# Altium PCB doan2.PcbDoc
Units mil, origin at the board's own origin, x right, y up, seen from the top; angles counter-clockwise.
Board outline 3095 x 3385 mil, 2 copper layers (Top Layer, Bottom Layer); 54 components, 62 nets, 229 pads, 26 vias.
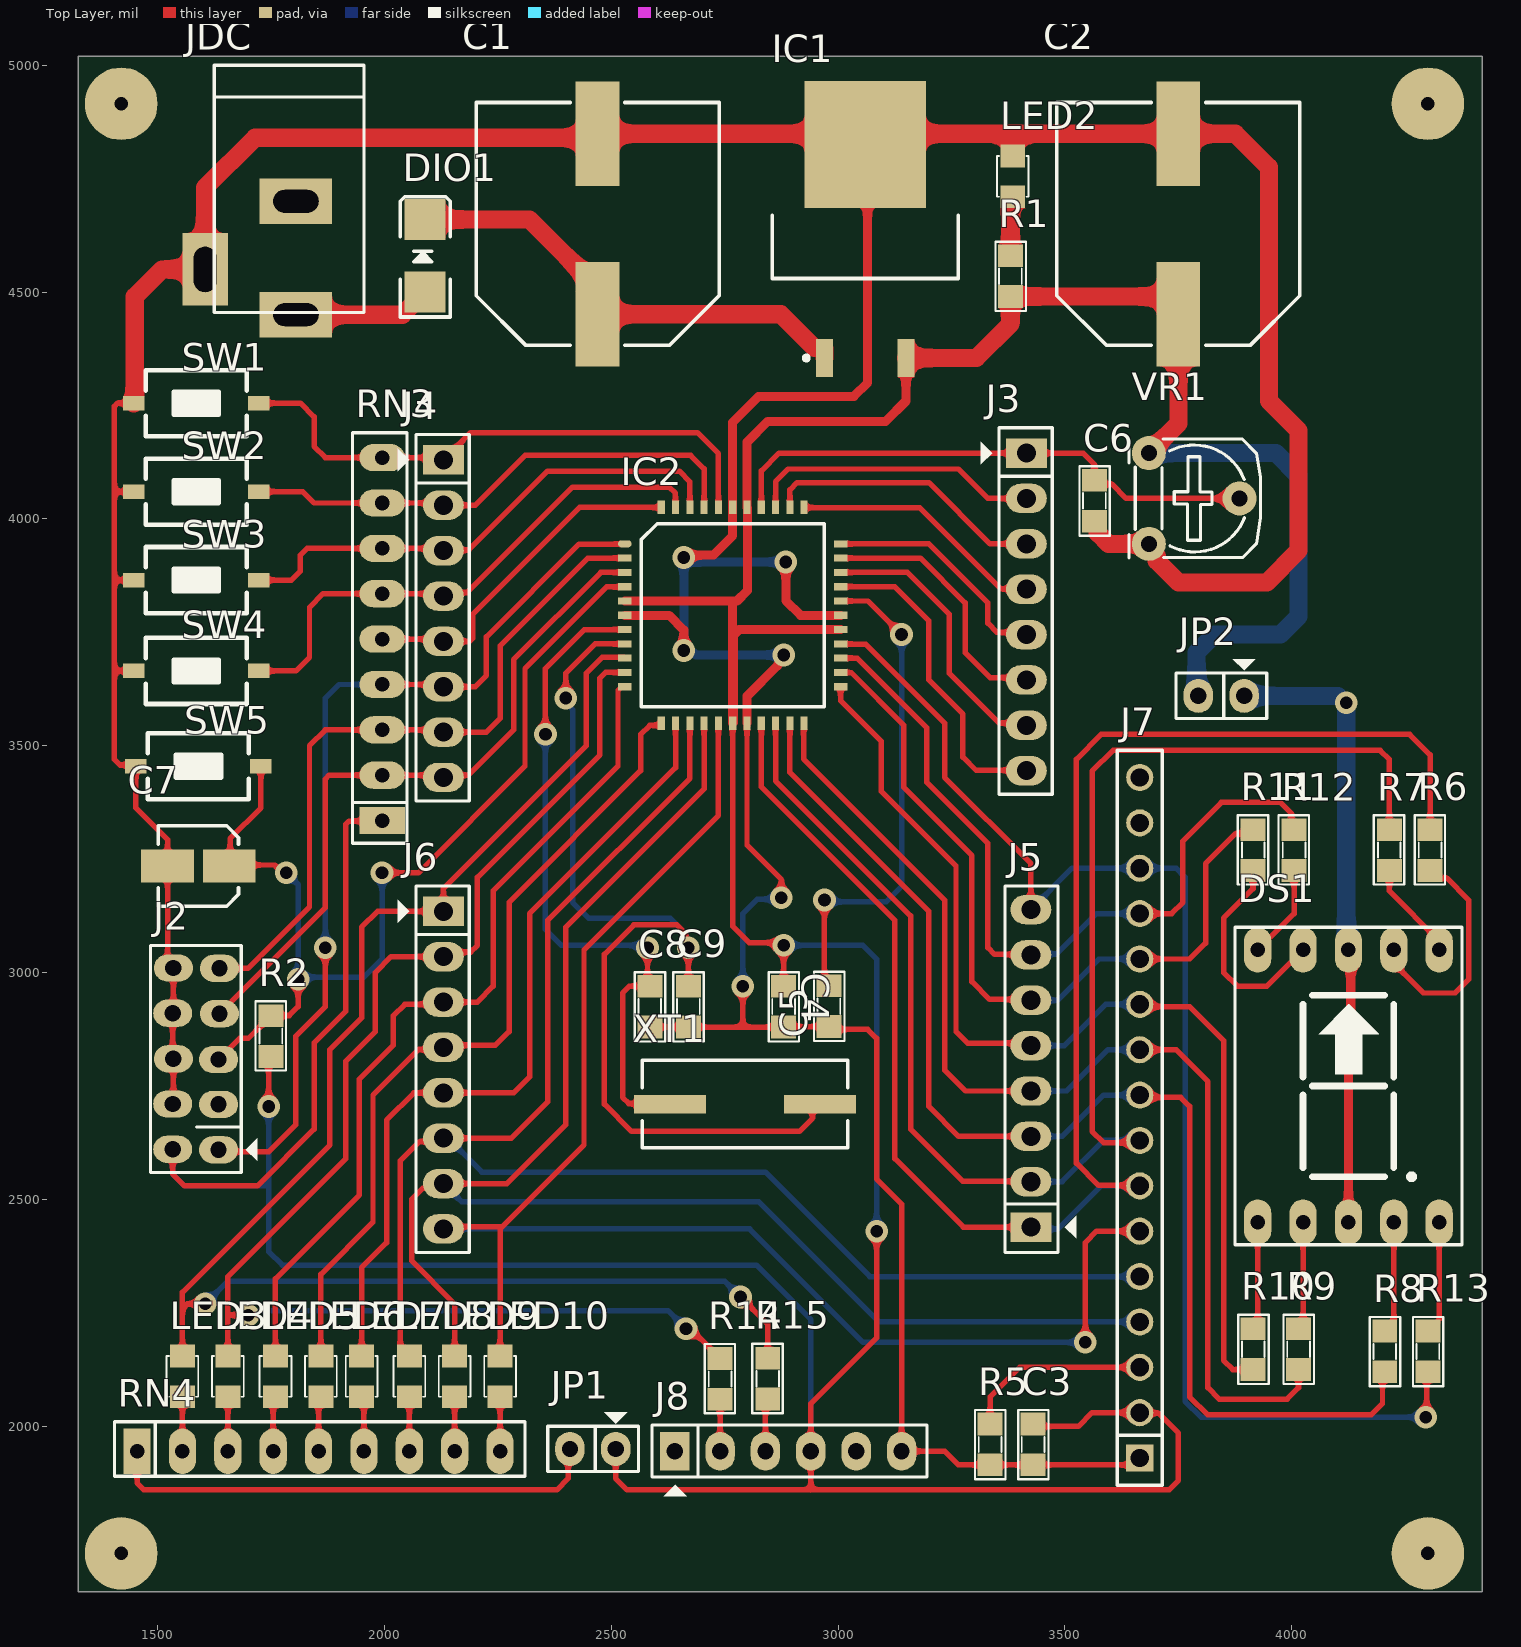
[diagram p0: Top Layer view]
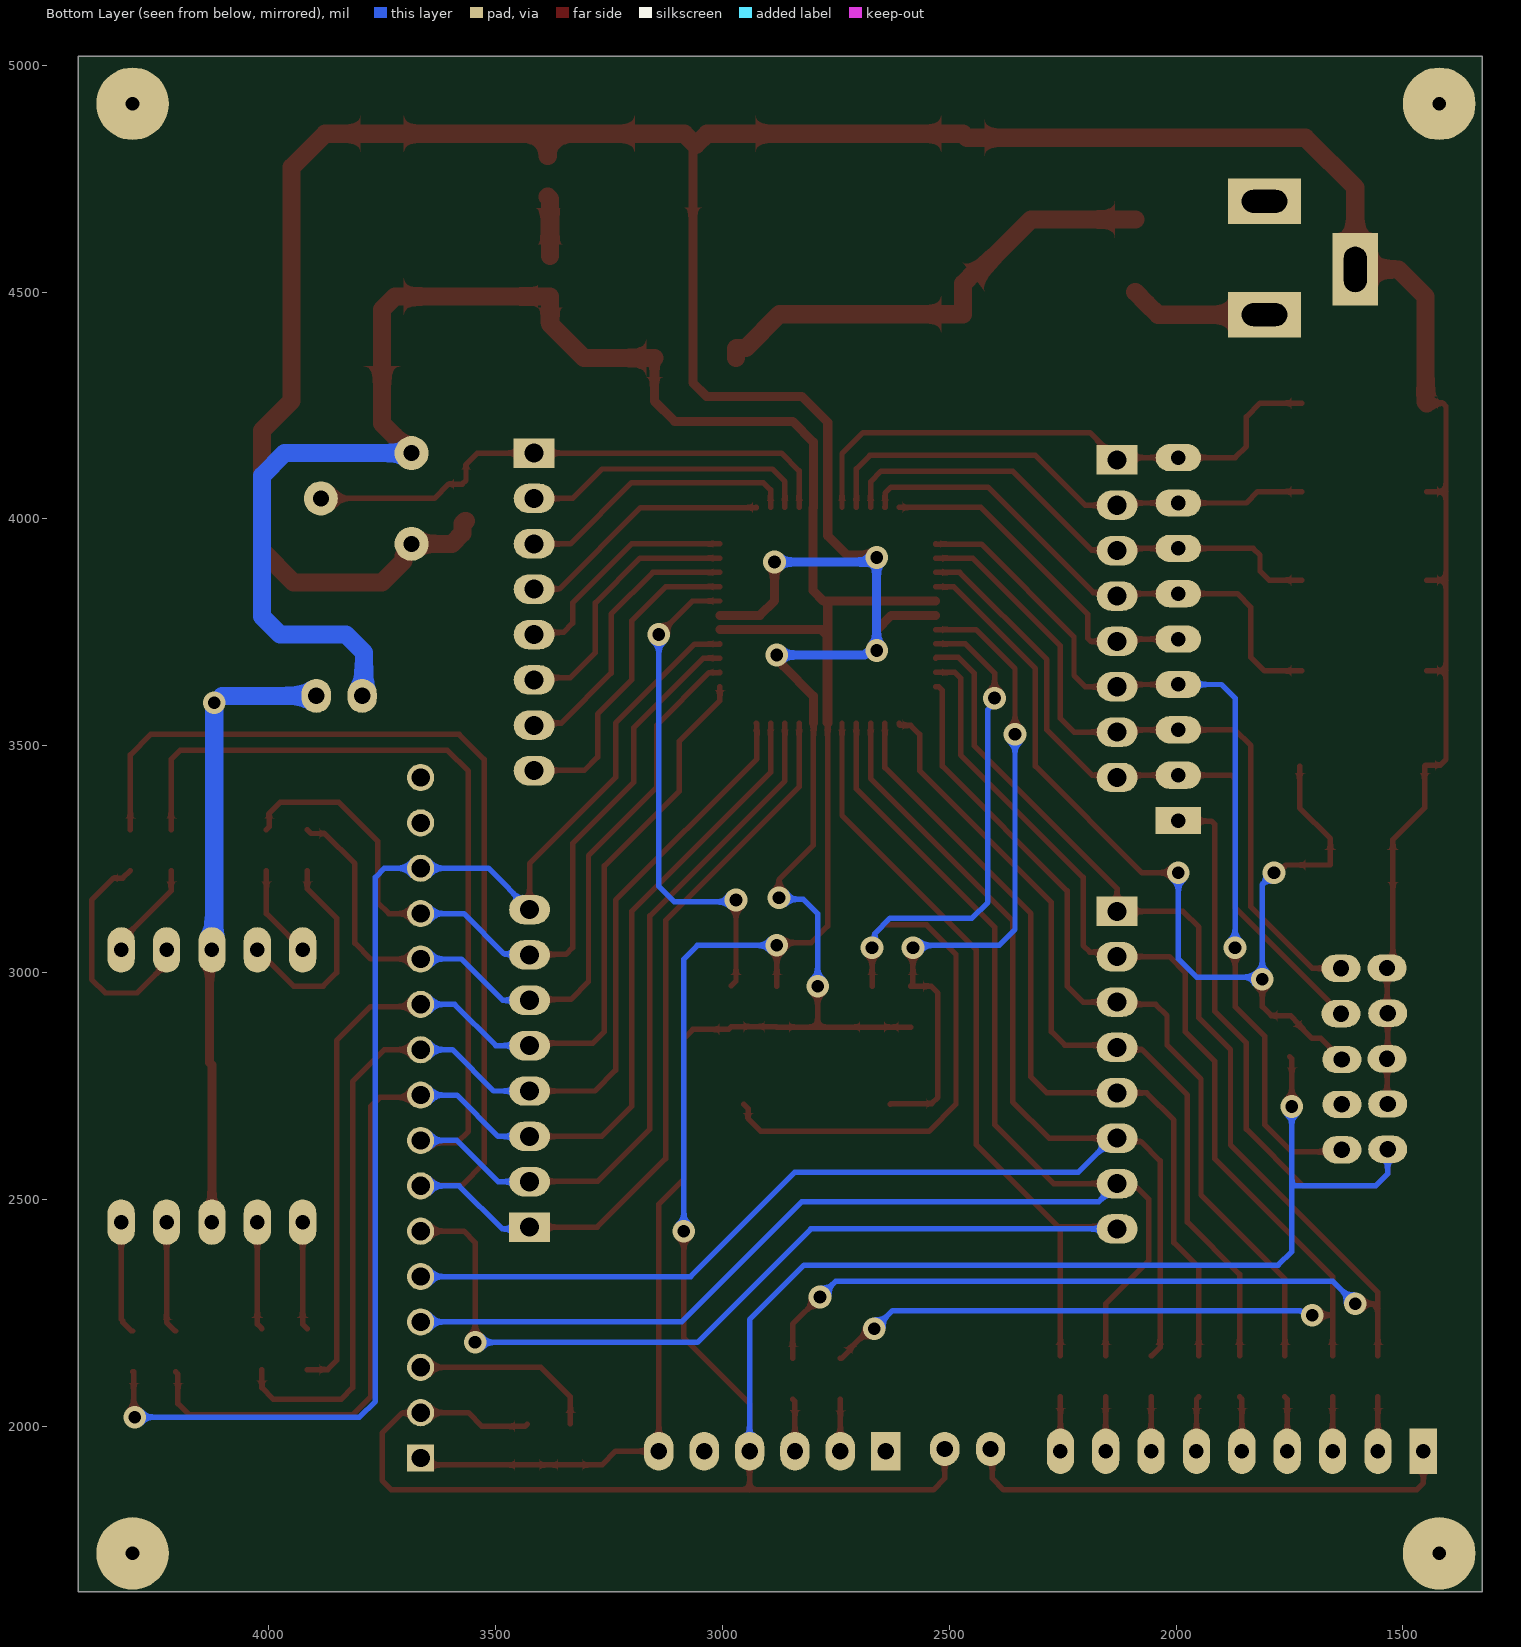
[diagram p1: Bottom Layer view, seen from below]
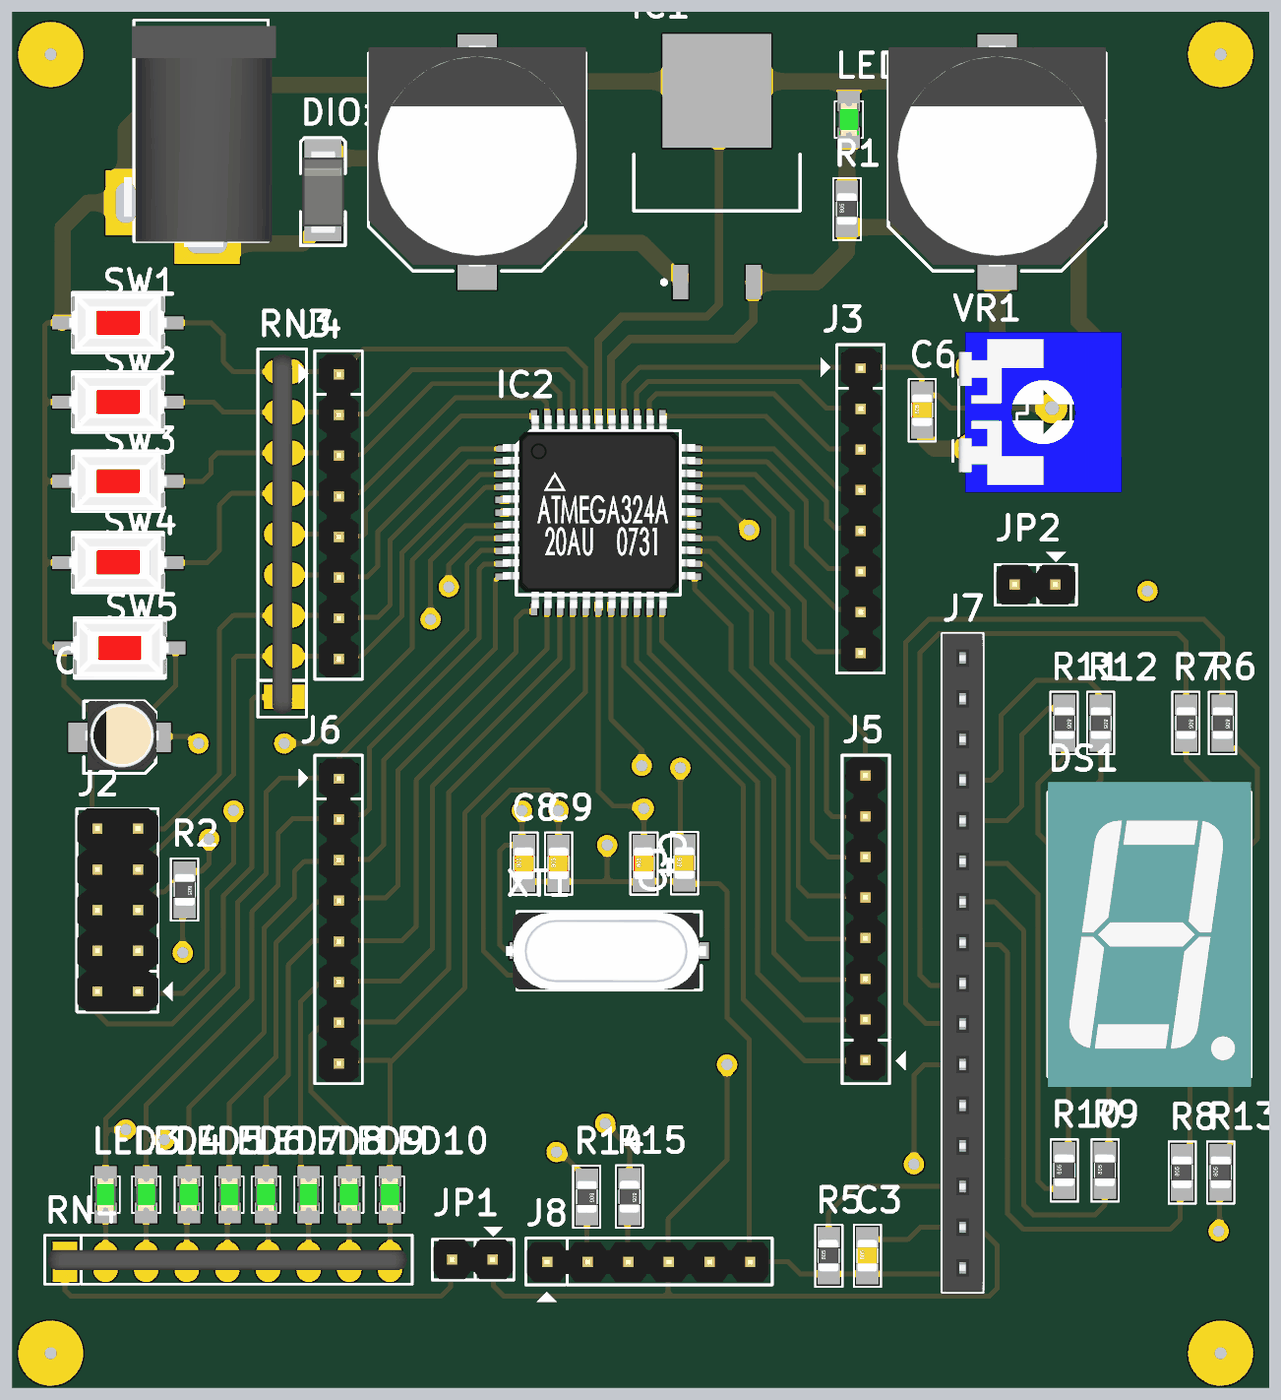
[diagram p2: 3D render of the assembled board from above, using the file's embedded part models]

## Layer stack, top to bottom
Top Solder: solder mask 0.4, Solder Resist, Dk 3.5
Top Layer: signal copper 1.4
Dielectric 1: dielectric 12.6, FR-4, Dk 4.8
Bottom Layer: signal copper 1.4
Bottom Solder: solder mask 0.4, Solder Resist, Dk 3.5

## Board outline
4420,5020 4420,1635 1325,1635 1325,5020

## Design rules (kind name [scope] priority, off if disabled: settings)
Clearance [All] p1: gap=10 ignorepadtopadclearanceinfootprint=FALSE except(0: Arc-Hole Track-Hole SMDPad-Hole THPad-Hole Via-Hole Fill-Hole Poly-Hole Region-Hole Text-Hole)
PolygonConnect [All] p1: connectstyle=Relief reliefconductorwidth=10 reliefentries=4 polygonreliefangle="90 Angle" airgapwidth=10
RoomDefinition doan2 [InComponentClass('doan2')] p1: confinementstyle=ConfineIn formatcopy=TRUE lockcomponents=FALSE outline 7045,1060 7275,1060 7275,1690 7045,1690
RoutingVias [All] p1: holewidth=28 width=50 viastyle="Through Hole" minholewidth=28 minwidth=50 maxholewidth=28 maxwidth=50
SolderMaskExpansion [All] p1: expansion=4 istentingtop=FALSE
Width [All] p1: maxlimit=40 minlimit=12 preferedwidth=20 minimp=50.000000 maximp=50.000000 favimp=50.000000
30 further rules are at their usual default settings.

## Components (designator, comment, footprint, x,y, rotation, side; value= is the part's Value field where it differs from the comment)
C1 "1000uF/16V" CAP1000uf/25V 2470,4650 r90 top
C2 "1000uF/16V" CAP1000uf/25V 3750,4650 r90 top
C3 "100n" SM-CAP-0805 3430,1915 r90 top value=0,1uF/300V
C4 "100n" SM-CAP-0805 2880,2880 r90 top value=0,1uF/300V
C5 "100n" SM-CAP-0805 2980,2881 r90 top value=0,1uF/300V
C6 "100n" SM-CAP-0805 3565,3995 r90 top value=0,1uF/300V
C7 "10uF/16V" CAP10uf/16V 1590,3235 r180 top value=1000uF/16V
C8 "22p" SM-CAP-0805 2585,2880 r90 top value=0,1uF/300V
C9 "22p" SM-CAP-0805 2670,2880 r90 top value=0,1uF/300V
DIO1 "Diode" DIO-SMD-106 2090,4580 r270 top value=1N5007
DS1 "7SEG S" 7SEGS 3925,2450 r0 top value="LED 7S SEG"
IC1 "LM7805" LM7805/DPAK 3060,4640 r90 top
IC2 "ATmega16L_dan" DIP44/W0.6 2530,3945 r0 top
J2 "JP5X2" JP5X2 1635,2610 r90 top
J3 "PA" JP8 3415,4145 r270 top value=JP7
J4 "PB" JP8 2130,4130 r270 top value=JP7
J5 "PC" JP8 3425,2439 r90 top value=JP7
J6 "PD" JP8 2130,3135 r270 top value=JP7
J7 "LCD 1602" JP16-C1T 3665,1930 r90 top
J8 "UART-USB" JP6 2640,1945 r0 top value=JP7
JDC "Jac DC" DC-IN 1705,4575 r270 top
JP1 "Jumper 2" JP2 2510,1950 r180 top value="JP 2"
JP2 "Jumper 2" JP2 3895,3610 r180 top value="JP 2"
LED2 "LED SMD" "SM-LED-0805-Green - duplicate" 3385,4710 r90 top
LED3 "LED SMD" "SM-LED-0805-Green - duplicate" 1555,2065 r90 top
LED4 "LED SMD" "SM-LED-0805-Green - duplicate" 1655,2065 r90 top
LED5 "LED SMD" "SM-LED-0805-Green - duplicate" 1760,2065 r90 top
LED6 "LED SMD" "SM-LED-0805-Green - duplicate" 1860,2065 r90 top
LED7 "LED SMD" "SM-LED-0805-Green - duplicate" 1950,2065 r90 top
LED8 "LED SMD" "SM-LED-0805-Green - duplicate" 2055,2065 r90 top
LED9 "LED SMD" "SM-LED-0805-Green - duplicate" 2155,2065 r90 top
LED10 "LED SMD" "SM-LED-0805-Green - duplicate" 2255,2065 r90 top
R1 "1k" SM-RES-0805 3380,4490 r90 top value="R1/4W - 1K"
R2 "10K" SM-RES-0805 1750,2905 r270 top value="R1/4W - 1K"
R5 "1k" SM-RES-0805 3335,1915 r90 top value="R1/4W - 1K"
R6 "1k" SM-RES-0805 4305,3315 r270 top value="R1/4W - 1K"
R7 "1k" SM-RES-0805 4215,3315 r270 top value="R1/4W - 1K"
R8 "1k" SM-RES-0805 4205,2120 r90 top value="R1/4W - 1K"
R9 "1k" SM-RES-0805 4015,2125 r90 top value="R1/4W - 1K"
R10 "1k" SM-RES-0805 3915,2125 r90 top value="R1/4W - 1K"
R11 "1k" SM-RES-0805 3915,3315 r270 top value="R1/4W - 1K"
R12 "1k" SM-RES-0805 4005,3315 r270 top value="R1/4W - 1K"
R13 "1k" SM-RES-0805 4300,2120 r90 top value="R1/4W - 1K"
R14 "100R" SM-RES-0805 2740,2149.5 r270 top value="R1/4W - 1K"
R15 "100R" SM-RES-0805 2845,2150 r270 top value="R1/4W - 1K"
RN3 "10K" RN8 1995,3335 r90 top value="Tro thanh 10K"
RN4 "1K" RN8 1455,1945 r0 top value="Tro thanh 10K"
SW1 "SW-SMD" SW-SMD 1585.42,4255 r0 top
SW2 "SW-SMD" SW-SMD 1585.42,4060 r0 top
SW3 "SW-SMD" SW-SMD 1585.42,3865 r0 top
SW4 "SW-SMD" SW-SMD 1585.42,3665 r0 top
SW5 "RESET" SW-SMD 1590,3455 r0 top
VR1 "10K" VR 3685,4145 r270 top value="VR 10K"
XT1 "8Mhz" XT2 2795,2710 r180 top value=4Mhz

## Footprints (in the part's own frame and the unit in brackets; to place one, negate y for a bottom-side part, rotate by r counter-clockwise, add the part's x,y. Pads: shape width x height; smd on the part's side, far side on the other; paste and mask are expansions set on the pad)
7SEGS [mil] "DIP 10 Leads; Body 12 x 15 mm; Pitch 0.5 mm"
  oval 60x100 hole 32: 1(0,0) 2(100,0) 3(200,0) 4(300,0) 5(400,0) 6(400,600) 7(300,600) 8(200,600) 9(100,600) 10(0,600)
  silkscreen extent -50,-50 450,650, body extent -50,-75 450,675, height 316
CAP10uf/16V [mm] "Aluminum Electrolytic Capacitor, Body 4.30x4.30x5.50mm, IPC Low Density"
  rect 2.95x1.85 smd: 1(-1.725,0) 2(1.725,0)
  silkscreen extent -2.25,-2.25 2.25,2.25, body extent -2.44,-2.27 2.16,2.03, height 5.63
CAP1000uf/25V [mm] "Aluminum Electrolytic Capacitor, Body 13.50x13.50x13.50mm, IPC Low Density"
  rect 5.85x2.45 smd: 1(-5.05,0) 2(5.05,0)
  silkscreen extent -6.8,-6.8 6.8,6.8, body extent -6.52,-6.8 7.28,6.8, height 13.5
DC-IN [mil] "Jac DC input"
  rect 100x160 hole 50 slot 100 at 90 deg: 1(125,100) 2(-125,100)
  rect 160x100 hole 50 slot 100 at 0 deg: 3(25,-100)
  silkscreen extent -425,-80 120,250, body extent -410,-105 134,269, height 434
DIO-SMD-106 [mil]
  rect 90x90.55 smd: 1(80,0) 2(-80,0)
  silkscreen extent -130,-55 135,55, body extent -99,-50 106,52, height 95
DIP44/W0.6 [mm] "44PIN"
  oval 0.75x0.4 smd: 1(0,0)
  rect 0.75x0.4 smd: 2(0,-0.8) 3(0,-1.6) 4(0,-2.4) 5(0,-3.2) 6(0,-4) 7(0,-4.8) 8(0,-5.6) 9(0,-6.4) 10(0,-7.2) 11(0,-8) 23(12.08,-8) 24(12.08,-7.2) 25(12.08,-6.4) 26(12.08,-5.6) 27(12.08,-4.8) 28(12.08,-4) 29(12.08,-3.2) 30(12.08,-2.4) 31(12.08,-1.6) 32(12.08,-0.8) 33(12.08,0)
  rect 0.4x0.75 smd: 12(2.04,-10.04) 13(2.84,-10.04) 14(3.64,-10.04) 15(4.44,-10.04) 16(5.24,-10.04) 17(6.04,-10.04) 18(6.84,-10.04) 19(7.64,-10.04) 20(8.44,-10.04) 21(9.24,-10.04) 22(10.04,-10.04) 34(10.04,2.04) 35(9.24,2.04) 36(8.44,2.04) 37(7.64,2.04) 38(6.84,2.04) 39(6.04,2.04) 40(5.24,2.04) 41(4.44,2.04) 42(3.64,2.04) 43(2.84,2.04) 44(2.04,2.04)
  silkscreen extent 0.91,-9.13 11.17,1.13, body extent 0.08,-9.95 12.11,2.08, height 1.01
JP2 [mil]
  oval 65x75 hole 36: 1(0,0) 2(101,0)
  silkscreen extent -50,-81 150,50, body extent -48,-50 148,48, height 323
JP5X2 [mil]
  oval 60x86 hole 36: 1(-0.5,0.5) 2(99.5,0.5) 3(198.5,0.5) 4(299.5,-1.5) 5(399.5,-1.5) 6(0.5,101.5) 7(100.5,101.5) 8(200,100) 9(300.5,101.5) 10(400,100)
  silkscreen extent -51,-85 450,151, body extent -50,-50 450,150, height 335
JP6 [mil] "JP6"
  rect 65x85 hole 36: 1(0,0)
  oval 65x85 hole 36: 2(100,0) 3(200,0) 4(300,0) 5(400,0) 6(500,0)
  silkscreen extent -50,-99 556,58, body extent -48,-50 548,48, height 323
JP8 [mil] "JP8"
  rect 65x90 hole 42: 1(0,0)
  oval 65x90 hole 42: 2(100,0) 3(200,0) 4(300,0) 5(400,0) 6(500,0) 7(600,0) 8(700,0)
  silkscreen extent -56,-100 752,57, body extent -48,-50 748,48, height 323
JP16-C1T [mm] "16 row, straight, gold plating"
  rect 1.52x1.52 hole 1.02: 1(0,0)
  round 1.52 hole 1.02: 2(2.54,0) 3(5.08,0) 4(7.62,0) 5(10.16,0) 6(12.7,0) 7(15.24,0) 8(17.78,0) 9(20.32,0) 10(22.86,0) 11(25.4,0) 12(27.94,0) 13(30.48,0) 14(33.02,0) 15(35.56,0) 16(38.1,0)
  silkscreen extent -1.52,-1.27 39.62,1.27, body extent -1.52,-1.25 39.62,1.25, height 8.51
LM7805/DPAK [mm] "D2-PAK, 3-Pads, Body 7.78x8.56mm (max), IPC Medium Density"
  rect 2.15x0.95 smd: 1(-7.25,2.28) 3(-7.25,-2.28)
  rect 7.1x6.8 smd: 2(4.7,0)
  silkscreen extent -7.37,-5.2 0.75,5.2, body extent -2.8,-5.2 6.55,5.2, height 4.6
RN8 [mil] "R SIP8, 9 Pin"
  rect 60x100 hole 32: 1(0,0)
  oval 60x100 hole 32: 2(100,0) 3(200,0) 4(300,0) 5(400,0) 6(500,0) 7(600,0) 8(700,0) 9(800,0)
  silkscreen extent -50,-55 855,65, body extent -43,-20 843,29, height 219
SM-CAP-0805 [mil]
  rect 50x55 smd: 1(0,0) 2(90,0)
  silkscreen extent -32,-34 121,33, body extent 6,-25 84,25, height 31
"SM-LED-0805-Green - duplicate" [mil]
  rect 50x55 smd: 1(0,0) 2(90,0)
  silkscreen extent 0,-35 90,35, body extent 5,-25 85,25, height 43
SM-RES-0805 [mil]
  rect 50x55 smd: 1(0,0) 2(90,0)
  silkscreen extent -32,-34 121,33, body extent 6,-25 84,25, height 31
SW-SMD [mm] "Switch SMD type"
  rect 1.2x0.8 smd: 1(-3.5,0) 2(3.5,0)
  silkscreen extent -2.82,-1.85 2.82,1.85, body extent -3.05,-1.85 3.05,1.85, height 2.5
VR [mil] "Resistor Variable"
  round 75 hole 35: 1(0,0) 2(100,200) 3(200,0)
  silkscreen extent -31,-44 231,246, body extent -87,-30 307,372, height 165
XT2 [mm] "Molded Capacitor, 2-Leads, Body 11.40x4.43mm, IPC Medium Density"
  rect 4.05x1.05 smd: 1(-4.2,0) 2(4.2,0)
  silkscreen extent -5.75,-2.45 5.75,2.45, body extent -6.05,-2.38 6.45,2.42, height 4.01

## Part data
C1 C2: library part CAP1000uf/25V, "Cap 1000uF/16V - 220uF/50V", Description 1="2200uF-3300uF/6,3V - 1000uF-2200uF/10V", Description 2="1000uF/16V - 470uF => 1000uF/25V - 100uF/100V", Description 3=330uF>470uF/35V_220uF>470uF/50V_10uF>22uF/250V, Description 4="220uF => 330uF/63V - 10uF =>33uF/160 - 200V", Description 5="4,7uF>10uF/250V_3,3uF>10uF/400V - 2,2uF>4,7uF/450V"
C3 C4 C5 C6 C8 C9: library part CN, Designed by=VanDungEvn
C7: library part CAP10uf/16V, "Cap 1000uF/16V - 220uF/50V", Description 1="2200uF-3300uF/6,3V - 1000uF-2200uF/10V", Description 2="1000uF/16V - 470uF => 1000uF/25V - 100uF/100V", Description 3=330uF>470uF/35V_220uF>470uF/50V_10uF>22uF/250V, Description 4="220uF => 330uF/63V - 10uF =>33uF/160 - 200V", Description 5="4,7uF>10uF/250V_3,3uF>10uF/400V - 2,2uF>4,7uF/450V"
DIO1: "Default Diode", Code - JEDEC=DO-214-AB, Published=8-Jun-2000, Publisher="Altium Limited", Revision="July-2002: Re-released for DXP Platform."
DS1: library part LED7S, "Single 7 Seg Dipslay"
J3 J4 J5 J6: library part JP8, "JP8 PIN"
J7: library part JP16, "WR-PHD 2.54 mm Angled Socket Header", Manufacturer="W¨¹rth Elektronik eiSos GmbH", partNo=613016143121, ComponentLink1 Description=Manufacturer, ComponentLink1URL=http://www.we-online.com, ComponentLink2 Description=Datasheet, ComponentLink2URL=http://katalog.we-online.de/em/datasheet/6130xx143121.pdf, Created by="Karrer Zheng", Created Date="29 March 2013", NoPins=16
J8: library part JP6, "JP6 PIN"
JDC: library part DCIN, "Jac DC input"
JP1 JP2: library part "JP 2"
LED2 LED3 LED4 LED5 LED6 LED7 LED8 LED9 LED10: library part LED-SMD-0805
R1 R2 R5 R6 R7 R8 R9 R10 R11 R12 R13 R14 R15: library part R1/4W, "Resistor 1/4W"
RN3 RN4: library part RN8, "Resistor 8 (Thanh)"
SW1 SW2 SW3 SW4: "Switch", LatestRevisionDate=17-Jul-2002, LatestRevisionNote="Re-released for DXP Platform.", PackageReference=SPST-2, Published=24-Mar-1999, Publisher="Altium Limited"
SW5: library part SW-SMD, "Switch", LatestRevisionDate=17-Jul-2002, LatestRevisionNote="Re-released for DXP Platform.", PackageReference=SPST-2, Published=24-Mar-1999, Publisher="Altium Limited"
VR1: library part VR, "Var Resistor"
XT1: library part XT2, "Crystal For all Crystal 2pin."

## Free pads (board coordinates)
  round 160 hole 30: 2(4300,4915) 3(4300,1720) 5(1420,4915) 7(1420,1720)

## Via types
v1: diameter 50, hole 28, Top Layer to Bottom Layer, 26 vias

## Nets (pads, with @x,y where several pads share a name; then routed paths per layer and width w, separated by ;. In a path a pad name is that pad's centre, name@x,y a point inside that pad or via, vN(x,y) a via of type N, cw(c..) or ccw(c..) an arc to the next point about the centre after c; other vN are vias at no path point)
AVR_RX: IC2.9 J6.1 LED3.2 R15.1 | length 3488.1
  Top Layer w12: LED3.2 1555,2260 ; v1(1605,2270) 1565,2270 1555,2260 ; IC2.9 2528.13,3694.91 2514.3,3694.91 2514.21,3695 2480,3695 2445,3660 2445,3500 2130,3185 J6.1 1985,3135 1950,3100 1950,2900 1880,2830 1880,2620 1555,2295 1555,2260 ; v1(2785,2285) 2845,2225 R15.1
  Bottom Layer w12: v1(1605,2270) 1655,2320 2750,2320 v1(2785,2285)
AVR_TX: IC2.10 J6.2 LED4.2 R14.1 | length 3125.8
  Top Layer w12: LED4.2 1655,2242.5 ; v1(1700,2245) 1657.5,2245 1655,2242.5 ; IC2.10 2487.58,3661.54 2475,3648.95 2475,3480 2205,3210 2205,3060 2190.14,3045.14 2140.14,3045.14 J6.2 2015,3035 1980,3000 1980,2870 1915,2805 1915,2590 1655,2330 1655,2242.5 ; v1(2665,2215) 2674.5,2215 2718.5,2171 2718.5,2168.5 2737.5,2149.5 R14.1
  Bottom Layer w12: v1(1700,2245) 1707.27,2252.27 1723.3,2252.27 1726.03,2255 2625,2255 v1(2665,2215)
FT_RX: J8.2 R14.2 | length 114.5
  Top Layer w12: J8.2 R14.2
FT_TX: J8.3 R15.2 | length 117.1
  Top Layer w12: J8.3 2840,2055 R15.2
GND: C1.2 C2.2 C3.1 C4.1 C5.1 C6.1 C7.2 C8.1 C9.1 IC1.2 IC2.6 IC2.18 IC2.28 IC2.39 J2.7 J2.8 J2.9 J2.10 J7.1 J8.6 JDC.3 LED2.2 R5.1 SW1.1 SW2.1 SW3.1 SW4.1 SW5.1 VR1.3 | length 11572
  Top Layer w12: SW4.1 1405,3665 ; SW3.1 1405,3865 ; SW2.1 1405,4060 ; SW1.1 1412.03,4255 1405,4247.97 1405,4060 ; J2.7 1535,2712 J2.8 1533.5,2811.5 J2.9 1535,2912 J2.10 1522.09,3022.91 C7.2 1522.09,3292.91 1452.2,3362.8 SW5.1 1449.82,3457.39 1417.61,3457.39 1405,3470 1405,3665 ; C8.1 C9.1 2790,2880 ; v1(2790,2970) 2790,2880 ; IC2.18 2799.29,3280.71 2875,3205 v1(2875,3165) ; J7.1 3650,1915 C3.1 R5.1 3265,1915 3235,1945 J8.6 3140,2490 3085,2545 3085,2855 3065,2875 2986,2875 C5.1 2881,2881 C4.1 2790,2880 ; 1405,3665 1405,3865 ; 1405,3865 1405,4060
  Top Layer w20: IC2.6 2627.48,3787.52 2660,3755 v1(2660,3710) ; v1(2660,3915) 2665,3920 2725,3920 2767.8,3962.8 IC2.39 2767.8,4212.8 2825,4270 3035,4270 3065,4300 3065,4820.04 IC1.2 ; IC2.18 2799.29,3609.29 2866.11,3676.11 2866.11,3677.99 2880,3691.88 v1(2880,3700) ; v1(2885,3905) 2885,3820 2917.48,3787.52 IC2.28
  Top Layer w40: SW1.1 1450,4257.38 1450,4490 1510,4550 JDC.3 1605,4730 1715,4840 2461.18,4840 C1.2 3033.78,4848.82 3058.78,4823.82 IC1.2 3083.78,4848.82 3385,4848.82 ; LED2.2 3385,4848.82 ; C6.1 3567.5,3995 3572.5,3990 3572.5,3968.43 3595.93,3945 3675.53,3945 3702.5,3918.03 3702.5,3907.5 3750,3860 3945,3860 4015,3930 4015,4195 3950,4260 3950,4775 3876.18,4848.82 C2.2 3385,4848.82
  Bottom Layer w12: v1(2790,2970) 2790,3130 2821.59,3161.59 2871.59,3161.59 v1(2875,3165)
  Bottom Layer w20: JDC.3@1605,4520 JDC.3 ; v1(2880,3700) 2686.72,3700 2682.46,3704.26 2665.74,3704.26 v1(2660,3710) v1(2660,3915) 2668.12,3915 2678.12,3905 v1(2885,3905)
MISO: IC2.2 J2.5 J4.7 RN3.3 | length 1573.8
  Top Layer w12: J2.5 1699.5,3009.5 1835,3145 1835,3500 1870,3535 RN3.3 2125,3535 J4.7 2225,3530 2255,3560 2255,3720 2448.5,3913.5 IC2.2
MOSI: IC2.1 J2.1 J4.6 RN3.4 | length 2018.9
  Top Layer w12: J2.1 1639,2605 1745,2605 1805,2665 1805,2860 1870,2925 v1(1870,3055) ; RN3.4 2125,3635 J4.6 2200,3630 2225,3655 2225,3740 2429.28,3944.28 2529.28,3944.28 IC2.1
  Bottom Layer w12: v1(1870,3055) 1870,3605 1900,3635 RN3.4
NetC1_1: C1.1 DIO1.2 IC1.1 | length 1058.3
  Top Layer w40: DIO1.2 2320,4660 2433.66,4546.34 2441.77,4546.34 2470,4518.11 C1.1 2873.62,4451.18 2947.91,4376.89 2968.94,4376.89 2970.24,4375.59 IC1.1
NetC5_2: C5.2 IC2.29 | length 1081.3
  Top Layer w12: v1@2970,3150 2970,2981 C5.2 ; IC2.29 3065.98,3819.02 v1(3140,3745)
  Bottom Layer w12: v1@2975.97,3155.97 3105.97,3155.97 3140,3190 v1(3140,3745)
  other v1: 2970,3160
NetC8_2: C8.2 IC2.7 XT1.2 | length 1521.3
  Top Layer w12: v1(2355,3525) 2355,3670 2441.02,3756.02 IC2.7 ; v1(2580,3055) 2580,2975 C8.2 2540,2970 2525,2955 2525,2725 2538.95,2711.05 2628.6,2711.05 XT1.2
  Bottom Layer w12: v1(2355,3525) 2355,3095 2390,3060 2575,3060 v1(2580,3055)
NetC9_2: C9.2 IC2.8 XT1.1 | length 2171.9
  Top Layer w12: v1(2400,3605) 2400,3660 2464.53,3724.53 IC2.8 ; C9.2 v1(2670,3055) 2664.09,3060.91 2664.09,3085.91 2645,3105 2550,3105 2485,3040 2485,2710 2545,2650 2915,2650 2943.36,2678.36 2943.36,2700.33 XT1.1@2953.03,2710
  Bottom Layer w12: v1(2400,3605) 2400,3594.72 2415,3579.72 2415,3155 2450,3120 2630,3120 2664.09,3085.91 2664.09,3060.91 v1(2670,3055)
NetDIO1_1: DIO1.1 JDC.1 | length 305.9
  Top Layer w40: JDC.1 2040,4450 2064.72,4474.72 2064.72,4475 2089.72,4500 DIO1.1
NetDS1_1: DS1.1 R10.2 | length 239.1
  Top Layer w12: R10.2 3925,2225 DS1.1
NetDS1_2: DS1.2 R9.2 | length 239.1
  Top Layer w12: R9.2 4025,2225 DS1.2
NetDS1_3: DS1.3 DS1.8 JP2.1 | length 1368.8
  Top Layer w12: v1@4109.72,3595 v1(4120,3595)
  Top Layer w20: DS1.3 4125,2796.72 4130,2801.72 4130,3045 DS1.8
  Bottom Layer w40: JP2.1 v1@4102.29,3610 ; v1(4120,3595) 4120,3089.14 4121.17,3087.97 4121.17,3053.83 DS1.8
NetDS1_4: DS1.4 R8.2 | length 248.9
  Top Layer w12: R8.2 4206,2210 4225,2229 DS1.4
NetDS1_5: DS1.5 R13.2 | length 251.8
  Top Layer w12: R13.2 4302.5,2210 4321.5,2229 4321.5,2232.53 4325,2236.03 DS1.5
NetDS1_6: DS1.6 R7.2 | length 220.6
  Top Layer w12: R7.2 4215,3180 4325,3070 DS1.6
NetDS1_7: DS1.7 R6.2 | length 521.3
  Top Layer w12: DS1.7 4225,3020 4290,2955 4360,2955 4390,2985 4390,3160 4341.98,3208.02 4321.98,3208.02 R6.2
NetDS1_9: DS1.9 R11.2 | length 476.6
  Top Layer w12: R11.2 3915,3185 3850,3120 3850,3000 3880,2970 3945,2970 3995.82,3020.82 4002.83,3020.82 4025,3042.99 DS1.9
NetDS1_10: DS1.10 R12.2 | length 212.2
  Top Layer w12: DS1.10 3925,3057.01 3947.17,3079.18 3954.18,3079.18 4005,3130 R12.2
NetJ7_3: J7.3 R5.2 | length 416.9
  Top Layer w12: R5.2 3335,2065 3400,2130 J7.3
NetJP1_2: JP1.2 RN4.1 | length 1103.2
  Top Layer w12: RN4.1 1455,1875 1470,1860 2380,1860 2405,1885 2405,1946 JP1.2
NetLED2_1: LED2.1 R1.2 | length 132.1
  Top Layer w40: R1.2 3380,4705 LED2.1
NetLED3_1: LED3.1 RN4.2 | length 120
  Top Layer w12: RN4.2 LED3.1
NetLED4_1: LED4.1 RN4.3 | length 120
  Top Layer w12: RN4.3 LED4.1
NetLED5_1: LED5.1 RN4.4 | length 122.1
  Top Layer w12: RN4.4 1755,2060 LED5.1
NetLED6_1: LED6.1 RN4.5 | length 122.1
  Top Layer w12: RN4.5 1855,2060 LED6.1
NetLED7_1: LED7.1 RN4.6 | length 122.1
  Top Layer w12: LED7.1 1955,2060 RN4.6
NetLED8_1: LED8.1 RN4.7 | length 120
  Top Layer w12: RN4.7 LED8.1
NetLED9_1: LED9.1 RN4.8 | length 120
  Top Layer w12: RN4.8 LED9.1
NetLED10_1: LED10.1 RN4.9 | length 120
  Top Layer w12: RN4.9 LED10.1
PA0: C6.2 IC2.37 J3.1 VR1.2 | length 1212.9
  Top Layer w12: IC2.37 2830.79,4105.79 2870,4145 J3.1 3540,4145 3565,4120 C6.2 3573.47,4076.53 3603.47,4076.53 3635,4045 VR1.2
PA1: IC2.36 J3.2 | length 648.1
  Top Layer w12: IC2.36 2862.28,4082.28 2890,4110 3265,4110 3330,4045 J3.2
PA2: IC2.35 J3.3 | length 622.3
  Top Layer w12: IC2.35 2893.78,4063.78 2910,4080 3200,4080 3335,3945 J3.3
PA3: IC2.34 J3.4 | length 564.4
  Top Layer w12: IC2.34 2925.59,4025 3180,4025 3359.03,3845.97 3414.03,3845.97 J3.4
PA4: IC2.33 J3.5 | length 533.6
  Top Layer w12: IC2.33 3200,3945 3330,3815 3330,3770 3350,3750 3410,3750 J3.5 J3.5@3400,3745
PA5: IC2.32 J3.6 | length 585.1
  Top Layer w12: IC2.32 3181.5,3913.5 3280,3815 3280,3705 3335,3650 3410,3650 J3.6
PA6: IC2.31 J3.7 | length 625.2
  Top Layer w12: IC2.31 3152.99,3882.01 3245,3790 3245,3660 3355.04,3549.96 3410.04,3549.96 J3.7
PA7: IC2.30 J3.8 | length 709.2
  Top Layer w12: IC2.30 3124.49,3850.51 3200,3775 3200,3645 3275,3570 3275,3475 3304.03,3445.97 3414.03,3445.97 J3.8
PB0: IC2.40 J4.1 RN3.9 SW1.2 | length 1265.4
  Top Layer w12: SW1.2 1815,4255 1845,4225 1845,4160 1870,4135 RN3.9 2125,4135 J4.1 2190,4190 2690,4190 2736.3,4143.7 IC2.40
PB1: IC2.41 J4.2 RN3.8 SW2.2 | length 1136.8
  Top Layer w12: SW2.2 1820,4060 1845,4035 RN3.8 2125,4035 J4.2 2200,4030 2310,4140 2675,4140 2704.8,4110.2 IC2.41
PB2: IC2.42 J4.3 RN3.7 SW3.2 | length 1140.2
  Top Layer w12: SW3.2 1795,3865 1815,3885 1815,3920 1830,3935 RN3.7 2125,3935 J4.3 2130.97,3930.97 2185.97,3930.97 2360,4105 2650,4105 2673.31,4081.69 IC2.42
PB3: IC2.43 J4.4 RN3.6 SW4.2 | length 1191.4
  Top Layer w12: SW4.2 1805,3665 1835,3695 1835,3805 1865,3835 RN3.6 2125,3835 J4.4 2137.46,3837.46 2182.46,3837.46 2415,4070 2627.77,4070 2641.2,4056.57 2641.2,4025.92 IC2.43
PB4: IC2.44 J4.5 RN3.5 | length 770.7
  Top Layer w12: RN3.5 2125,3735 J4.5 2187.97,3730 2195,3737.03 2195,3790 2430.32,4025.32 IC2.44
PC0: IC2.19 J5.1 J7.7 R6.1 | length 3769.3
  Top Layer w12: IC2.19 2830.79,3409.21 3125,3115 3125,2590 3276,2439 J5.1 ; J7.7 3664.11,2530.89 3574.11,2530.89 3525,2580 3525,3470 3580,3525 4260,3525 4305,3480 R6.1
  Bottom Layer w12: J5.1 3429,2435 3485,2435 3580,2530 J7.7
  Bottom Layer w20: J7.7@3660,2525 J7.7
PC1: IC2.20 J5.2 J7.8 R7.1 | length 3364.6
  Top Layer w12: IC2.20 2862.28,3422.72 3160,3125 3160,2655 3275,2540 3424,2540 J5.2 ; J7.8 3660,2625 3585,2625 3560,2650 3560,3443.89 3606.11,3490 4195,3490 4215,3470 R7.1
  Bottom Layer w12: J5.2 3494,2539 3585,2630 J7.8
  Bottom Layer w20: J7.8@3660,2625 J7.8
PC2: IC2.21 J5.3 J7.9 R8.1 | length 2793
  Top Layer w12: IC2.21 2893.78,3441.22 3200,3135 3200,2705 3266,2639 J5.3 ; J7.9 3670,2725 3755,2725 3775,2705 3775,2065 3815,2025 4175,2025 4200,2050 4200,2115 R8.1
  Bottom Layer w12: J5.3 3494,2639 3585,2730 J7.9
  Bottom Layer w20: J7.9@3660,2725 J7.9
PC3: IC2.22 J5.4 J7.10 R9.1 | length 2502.6
  Top Layer w12: IC2.22 2924,3548.45 2924,3471 3235,3160 3235,2785 3281,2739 J5.4 ; J7.10 3745,2830 3815,2760 3815,2085 3840,2060 3990,2060 4015,2085 R9.1
  Bottom Layer w12: J5.4 3504,2739 3595,2830 J7.10
  Bottom Layer w20: J7.10@3660,2825 J7.10
PC4: IC2.23 J5.5 J7.11 R10.1 | length 2324.4
  Top Layer w12: IC2.23 3005.59,3599.41 3095,3510 3095,3400 3260,3235 3260,2870 3285.54,2844.46 3419.54,2844.46 J5.5 ; J7.11 3670,2925 3775,2925 3850,2850 3850,2145 3870,2125 R10.1
  Bottom Layer w12: J5.5 3499,2839 3590,2930 J7.11
  Bottom Layer w20: J7.11@3660,2925 J7.11
PC5: IC2.24 J5.6 J7.12 R11.1 | length 1717.1
  Top Layer w12: IC2.24 3006.2,3660.93 3029.07,3660.93 3145,3545 3145,3407.97 3295,3257.97 3295,2980 3334.03,2940.97 3423.03,2940.97 J5.6 ; J7.12 3775,3030 3810,3065 3810,3240 3876.53,3306.53 3906.53,3306.53 R11.1
  Bottom Layer w12: J5.6 3484,2939 3575,3030 J7.12
  Bottom Layer w20: J7.12@3660,3025 J7.12
PC6: IC2.25 J5.7 J7.13 R12.1 | length 1736
  Top Layer w12: IC2.25 3041.97,3693.03 3195,3540 3195,3420 3330,3285 3330,3055 3345,3040 3424,3040 J5.7 ; J7.13 3735,3130 3760,3155 3760,3290 3845,3375 3975,3375 3999.03,3350.97 3999.03,3320.97 R12.1
  Bottom Layer w12: J5.7 3426.97,3040.97 3480.97,3040.97 3570,3130 J7.13
PC7: IC2.26 J5.8 J7.14 R13.1 | length 2987.5
  Top Layer w12: IC2.26 3006.12,3724 3061,3724 3235,3550 3235,3430 3425,3240 J5.8 ; v1(4295,2020) 4297.5,2022.5 4297.5,2120 R13.1
  Bottom Layer w12: J5.8 3516,3230 J7.14 3745,3230 3765,3210 3765,2055 3800,2020 v1(4295,2020)
  Bottom Layer w20: J7.14@3660,3225 J7.14
PD2: IC2.11 J6.3 LED5.2 | length 1888.8
  Top Layer w12: LED5.2 1760,2325 1945,2510 1945,2765 2020,2840 2020,2905 2045.04,2930.04 2125.04,2930.04 J6.3 2205,2935 2240,2970 2240,3180 2515,3455 2515,3621.93 2523.11,3630.04 IC2.11
PD3: IC2.12 J6.4 LED6.2 | length 1813
  Top Layer w12: LED6.2 1860,2335 1975,2450 1975,2730 2075.04,2830.04 2125.04,2830.04 2135,2840 2245,2840 2275,2870 2275,3155 2565,3445 2565,3525 2585,3545 2608.44,3545 2610.32,3546.87 IC2.12
PD4: IC2.13 J6.5 LED7.2 | length 1810.2
  Top Layer w12: LED7.2 1950,2350 2005,2405 2005,2675 2065,2735 J6.5 2285,2735 2320,2770 2320,3129.9 2641.81,3451.71 IC2.13
PD5: IC2.14 J6.6 J7.5 LED8.2 | length 3443.6
  Top Layer w12: LED8.2 2054,2155 2035,2174 2035,2585 2077.54,2627.54 2122.54,2627.54 J6.6 2280,2635 2360,2715 2360,3115 2673.31,3428.31 IC2.14
  Bottom Layer w12: J6.6 2140,2635 2215,2560 2840,2560 3070,2330 J7.5
PD6: IC2.15 J6.7 J7.4 LED9.2 | length 3465
  Top Layer w12: LED9.2 2155,2270 2060,2365 2060,2500 2084.86,2524.86 2119.86,2524.86 J6.7 2270,2535 2400,2665 2400,3100 2704.8,3404.8 IC2.15
  Bottom Layer w12: J6.7 2170,2495 2825,2495 3090,2230 J7.4
PD7: IC2.16 J6.8 J7.6 LED10.2 | length 3595.1
  Top Layer w12: J6.8 2135,2440 2255,2440 LED10.2 ; 2255,2435 2440,2620 2440,3050 2736.3,3346.3 IC2.16 ; v1(3545,2185) 3545,2405 3570,2430 J7.6
  Bottom Layer w12: J6.8 2805,2435 3055,2185 v1(3545,2185)
RESET: C7.1 IC2.4 J2.3 R2.1 SW5.2 | length 2225.9
  Top Layer w12: J2.3@1636,2810 J2.3 1662.94,2836.93 1681,2855 1700,2855 1728.5,2883.5 1728.5,2886 1747.5,2905 R2.1 1790,2905 1810,2925 v1(1810,2985) ; SW5.2 1727.8,3362.8 1660,3295 1660,3237.09 1757.97,3237.09 1775.06,3220 v1(1784,3220) ; v1(1995,3220) 2075,3220 2310,3455 2310,3670 2490,3850 2529.49,3850 IC2.4
  Bottom Layer w12: v1(1784,3220) 1810,3194 1810,2990 v1(1810,2985) 1815,2990 1955,2990 1995,3030 v1(1995,3220)
SCK: IC2.3 J2.4 J4.8 RN3.2 | length 1557.4
  Top Layer w12: J2.4 1664.94,2937.93 1870,3143 1870,3426.63 1878.37,3435 RN3.2 2125,3435 J4.8 2134.96,3434.96 2184.96,3434.96 2285,3535 2285,3690 2477.01,3882.01 IC2.3
VCC: C2.1 C3.2 C4.2 IC1.3 IC2.5 IC2.17 IC2.27 IC2.38 J2.6 J7.2 J8.4 JP1.1 JP2.2 R1.1 R2.2 RN3.1 VR1.1 | length 11225.5
  Top Layer w12: J2.6 1533.5,2556.5 1560,2530 1720,2530 1845,2655 1845,2845 1915,2915 1915,3327 1922.03,3334.03 1994.03,3334.03 RN3.1 ; v1(1745,2705) 1745,2810 R2.2 ; JP1.1 2510,1885 2535,1860 2940,1860 ; IC2.17 2767.8,3102.2 2804.09,3065.91 2874.09,3065.91 v1(2880,3060) C4.2 ; v1(3085,2430) 3085,2195 2940,2050 J8.4 2940,1860 ; C3.2 3435,2000 3530,2000 3560,2030 J7.2 3665.89,2029.11 3705.89,2029.11 3750,1985 3750,1880.45 3729.55,1860 2940,1860
  Top Layer w20: IC2.5 2775,3819.02 2777.26,3819.02 2800,3841.75 2800,4024.61 IC2.38 2799.29,4169.29 2845,4215 3105,4215 3149.76,4259.76 IC1.3 ; 2767.8,3819.02 2767.8,3743.6 IC2.17 2769.29,3551.22 2769.29,3743.6 2775,3749.31 2781.72,3756.02 IC2.27
  Top Layer w40: IC1.3 3304.57,4354.57 3380,4430 R1.1 3721.77,4490 3750,4461.77 C2.1 3750,4210 VR1.1 ; JP2.2 JP2.2@3795,3611
  Bottom Layer w12: J2.6 1533.5,2556.5 1560,2530 1740,2530 1745,2535 ; v1(1745,2705) 1745,2535 ; v1(2880,3060) 3055,3060 3085,3030 v1(3085,2430) ; J8.4 2940,2235 2820,2355 1775,2355 1745,2385 1745,2535
  Bottom Layer w40: VR1.1 3965,4145 4015,4095 4015,3785 3975,3745 3830,3745 3790,3705 3790,3614 JP2.2
pads on no net: J2.2 J7.15 J7.16 J8.1 J8.5 JDC.2